# Altium PCB PCB3.PcbDoc
Units mm, origin at the board's own origin, x right, y up, seen from the top; angles counter-clockwise.
Board outline 70 x 70 mm, 2 copper layers (Top Layer, Bottom Layer); 85 components, 71 nets, 282 pads, 5 vias.
Unrouted connection lines stored in the file: 144.
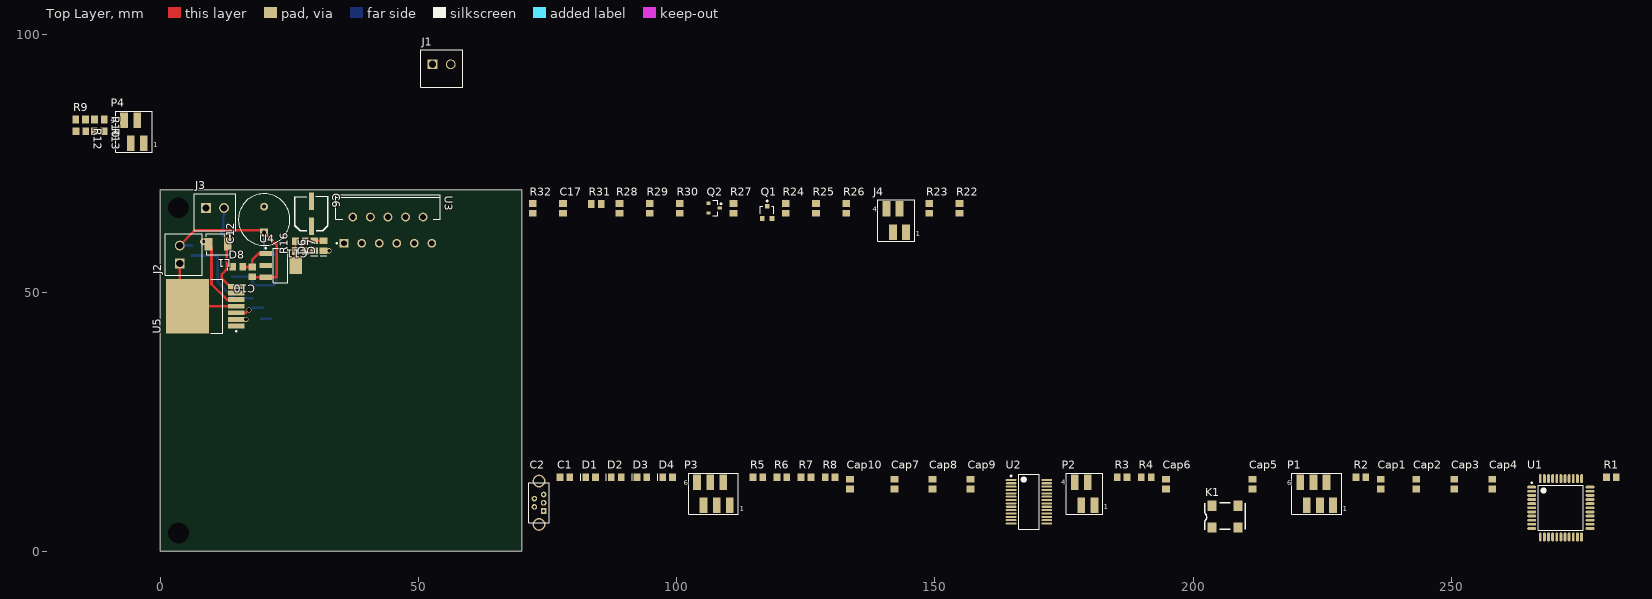
[diagram p0: Top Layer view]
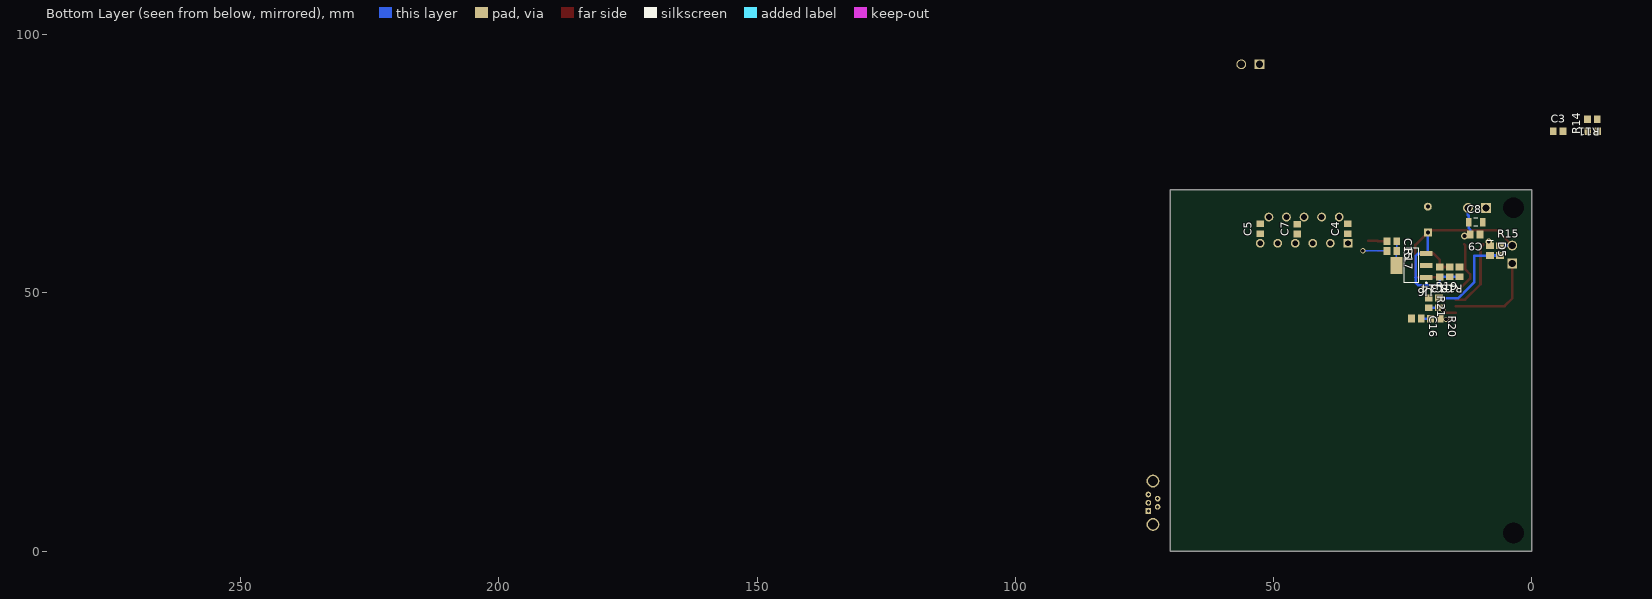
[diagram p1: Bottom Layer view, seen from below]

## Layer stack, top to bottom
Top Solder: solder mask 0.0102, Solder Resist, Dk 3.5
Top Layer: signal copper 0.0356
Dielectric 1: dielectric 0.32, FR-4, Dk 4.8
Bottom Layer: signal copper 0.0356
Bottom Solder: solder mask 0.0102, Solder Resist, Dk 3.5

## Board outline
0,70 70,70 70,0 0,0

## Design rules (kind name [scope] priority, off if disabled: settings)
Clearance [All] p1: gap=0.254
PolygonConnect [All] p1: connectstyle=Relief reliefconductorwidth=0.254 reliefentries=4 polygonreliefangle="90 Angle" airgapwidth=0.254
RoomDefinition "Sheet 4 - Capteurs" [InComponentClass('Sheet 4 - Capteurs')] p1: confinementstyle=ConfineIn formatcopy=TRUE lockcomponents=FALSE outline 71.135,58.559 158.614,58.559 158.614,70.735 71.135,70.735
RoomDefinition "Sheet 1 - Micro" [InComponentClass('Sheet 1 - Micro')] p2: confinementstyle=ConfineIn formatcopy=TRUE lockcomponents=FALSE outline 71.16,1.431 282.87,1.431 282.87,17.857 71.16,17.857
RoutingVias [All] p1: holewidth=0.711 width=1.27 viastyle="Through Hole" minholewidth=0.711 minwidth=1 maxholewidth=0.711 maxwidth=1.5
SolderMaskExpansion [All] p1: expansion=0.102
UnpouredPolygon [All] p1: allowunpoured=FALSE
Width [All] p1: maxlimit=0.5 minlimit=0.254 preferedwidth=0.254
29 further rules are at their usual default settings.

## Classes and differential pairs
component class "Sheet 4 - Capteurs": C17 J4 Q1 Q2 R22 R23 R24 R25 R26 R27 R28 R29 R30 R31 R32
component class "Sheet 3 - Alims": C8 C9 C10 C11 C12 C13 C14 C15 C16 D5 D6 D7 D8 J2 J3 L1 R15 R16 R17 R18 R19 R20 R21 U4 U5 U6
component class "Sheet 2 - Moteurs": C3 C4 C5 C6 C7 J1 P4 R9 R10 R11 R12 R13 R14 U3
component class "Sheet 1 - Micro": C1 C2 Cap1 Cap2 Cap3 Cap4 Cap5 Cap6 Cap7 Cap8 Cap9 Cap10 D1 D2 D3 D4 K1 P1 P2 P3 R1 R2 R3 R4 R5 R6 R7 R8 U1 U2

## Components (designator, comment, footprint, x,y, rotation, side; value= is the part's Value field where it differs from the comment)
C1 "100pF" C0805 78.335,14.307 r0 top
C2 "WE-Communication Connectors 651005136421" 651005136421 73.335,9.357 r90 top
C3 "0.1uF" C0805 -5.15,81.3 r180 bottom
C4 "10nF" C0805 35.6,62.425 r90 bottom
C5 "10nF" C0805 52.575,62.425 r90 bottom
C6 "220uF" "Capa CMS D6.3_E1.8" 29.25,65.35 r270 top
C7 "1uF" C0805 45.375,62.375 r90 bottom
C8 "100uF" C1206 10.8,63.7 r180 bottom
C9 "0.1uF" C0805 10.925,61.325 r0 bottom
C10 "1uF" C0805 17.8,54.075 r270 top
C11 "10uF" C0805 27.1,60 r180 top
C12 "1200uF" CAPA_D10_E5 20.1,64.2 r90 top
C13 "0.1uF" C0805 15.85,54.075 r270 bottom
C14 "1UF" C0805 17.775,54.05 r270 bottom
C15 "10uF" C0805 27.075,60.025 r180 bottom
C16 "0.2uF" C0805 22.3,45.025 r180 bottom
C17 "100pF" C0805 77.985,66.36 r90 top
Cap1 "0.1uF" C0805 236.343,12.982 r90 top
Cap2 "0.1uF" C0805 243.218,12.982 r90 top
Cap3 "0.1uF" C0805 250.569,12.982 r90 top
Cap4 "0.1uF" C0805 257.944,12.982 r90 top
Cap5 "0.1uF" C0805 211.517,12.982 r90 top
Cap6 "0.1uF" C0805 194.741,12.982 r90 top
Cap7 "0.1uF" C0805 142.188,12.982 r90 top
Cap8 "0.1uF" C0805 149.539,12.982 r90 top
Cap9 "4.7uF" C0805 156.914,12.982 r90 top
Cap10 "0.1uF" C0805 133.538,12.982 r90 top
D1 "LED" "LED 0805" 83.31,14.307 r0 top
D2 "LED" "LED 0805" 88.286,14.307 r0 top
D3 "LED" "LED 0805" 93.261,14.307 r0 top
D4 "LED" "LED 0805" 98.236,14.307 r0 top
D5 "D Schottky" D0805 8.05,58.175 r270 bottom
D6 "LED" "LED 0805" 29.8,59.125 r90 top
D7 "LED" "LED 0805" 31.6,59.125 r90 top
D8 "LED" "LED 0805" 14.975,55.05 r0 top
J1 "WE Type 691321100002" 691321100002 54.475,94.275 r0 top
J2 "WE Type 691321100002" 691321100002 3.75,57.425 r90 top
J3 "WE Type 691321100002" 691321100002 10.575,66.45 r0 top
J4 "WE 4 pins" 690367280476 142.513,64.009 r0 top
K1 "Quartz 10Mhz" IQXO-70 203.65,8.75 r0 top
L1 "15uH" "Inductance 4.06 x 4.45" 11.175,59.4 r180 top
P1 "mini connect" 690367280676 223.942,11.107 r0 top
P2 "mini connect" 690367280476 178.99,11.107 r0 top
P3 "Mini connect" 690367280676 107.112,11.107 r0 top
P4 "WE 4 pins" 690367280476 -5.126,81.225 r0 top
Q1 "MOSFET P" SOT-23 117.512,65.61 r0 top
Q2 "Transistor NPN" SOT23_L 107.237,66.41 r0 top
R1 "10K" 0805 281.02,14.307 r0 top
R2 "100R" 0805 232.518,14.307 r0 top
R3 "1K" 0805 186.265,14.307 r0 top
R4 "1K" 0805 190.941,14.307 r0 top
R5 "330R" 0805 115.712,14.307 r0 top
R6 "330R" 0805 120.362,14.307 r0 top
R7 "470R" 0805 125.037,14.307 r0 top
R8 "470R" 0805 129.713,14.307 r0 top
R9 "470R" 0805 -15.45,83.6 r0 top
R10 "10K" 0805 -11.825,83.575 r0 top
R11 "15K" 0805 -11.775,83.625 r0 bottom
R12 "1K" 0805 -15.4,81.3 r0 top
R13 "1K" 0805 -11.875,81.3 r0 top
R14 "1K" 0805 -11.825,81.325 r0 bottom
R15 "0R" 0805 6.1,58.2 r90 bottom
R16 "330R" 0805 27.1,58.1 r180 top
R17 "470R" 0805 27.05,58.1 r180 bottom
R18 "1K" 0805 13.95,54.075 r270 bottom
R19 "17K4" 0805 17.925,48.05 r90 bottom
R20 "1K" 0805 18.625,44.975 r180 bottom
R21 "2K" 0805 19.925,48.05 r270 bottom
R22 "215K" 0805 154.764,66.36 r90 top
R23 "10K" 0805 148.914,66.36 r90 top
R24 "0R" 0805 121.137,66.36 r90 top
R25 "1K" 0805 126.963,66.36 r90 top
R26 "0R" 0805 132.813,66.36 r90 top
R27 "1K" 0805 111.012,66.36 r90 top
R28 "0R" 0805 88.911,66.36 r90 top
R29 "10K" 0805 94.761,66.36 r90 top
R30 "0R" 0805 100.586,66.36 r90 top
R31 "10K" 0805 84.41,67.21 r0 top
R32 "3K4" 0805 72.135,66.36 r90 top
U1 "DSPIC33FJ128MC804T-I/PT" TQFP-PT44_N 271.245,8.382 r0 top
U2 "IC_FT232RL" SSOP-28 168.215,9.557 r0 top
U3 "LMD18200T" TA11B 44.075,62.15 r0 top
U4 "LM1117MP-3.3" MP04A_N 23.3,55.325 r0 top
U5 "LM2588S-ADJ" TS7B_N 8.7,47.425 r180 top
U6 "LM1117IMP-5.0" MP04A_N 23.275,55.3 r0 bottom

## Footprints (in the part's own frame and the unit in brackets; to place one, negate y for a bottom-side part, rotate by r counter-clockwise, add the part's x,y. Pads: shape width x height; smd on the part's side, far side on the other; paste and mask are expansions set on the pad)
0805 [mm] "Chip Resistor; Body 2.0 x 1.3 mm (LxW typ)"
  rect 1.3x1.5 smd: 1(-0.95,0) 2(0.95,0)
  body extent -1,-0.62 1,0.63, height 0.78
651005136421 [mm] "5 pins"
  rect 1.1x1.1 hole 0.6: 1(-1.6,-0.9)
  round 1.1 hole 0.6: 2(-0.8,0.9) 3(0,-0.9) 4(0.8,0.9) 5(1.6,-0.9)
  round 2.5 hole 2: Z1(4.2,0) Z2(-4.2,0)
  silkscreen extent -3.85,-1.98 3.85,1.98, body extent -5.1,-1.95 5.1,1.95, height 9.21
690367280476 [mm] "without Latch, 4 pins, SMT, straight"
  rect 1.5x3 smd: 1(1.905,-2.25) 2(0.635,2.25) 3(-0.635,-2.25) 4(-1.905,2.25)
  silkscreen extent -3.54,-4 3.54,4, body extent -3.54,-5 3.54,3.5, height 5.7
690367280676 [mm] "without Latch, 6 pins, SMT, straight"
  rect 1.5x3 smd: 1(3.175,-2.25) 2(1.905,2.25) 3(0.635,-2.25) 4(-0.635,2.25) 5(-1.905,-2.25) 6(-3.175,2.25)
  silkscreen extent -4.81,-4 4.81,4, body extent -4.81,-5 4.81,3.5, height 5.75
691321100002 [mm] "3,50mm - PCB Vertical - 02p"
  rect 1.9x1.9 hole 1.4: 1(-1.75,0)
  round 1.9 hole 1.4: 2(1.75,0)
  silkscreen extent -4.05,-4.4 4.05,2.8, body extent -4.05,-4.4 4.05,2.8, height 9.21
C0805 [mm] "Chip Resistor; Body 2.0 x 1.3 mm (LxW typ)"
  rect 1.3x1.5 smd: 1(-0.95,0) 2(0.95,0)
  body extent -0.97,-0.62 1.03,0.63, height 0.78
C1206 [mm] "Chip Capacitor, Body 3.2x1.6mm, IPC High Density"
  rect 1.1x1.7 smd: 1(-1.35,0) 2(1.35,0)
  silkscreen extent -0.4,-0.75 0.4,0.75, body extent -1.7,-0.9 1.7,0.9, height 1.3
"Capa CMS D6.3_E1.8" [mm]
  rect 3.4x1 smd: 1(2.4,0) 2(-2.4,0)
  silkscreen extent -3.33,-3.2 3.3,3.2, body extent -3.77,-3.3 3.83,3.3, height 8
CAPA_D10_E5 [mm]
  rect 1.524x1.524 hole 0.8: 1(-2.5,0)
  round 1.524 hole 0.8: 2(2.5,0)
  silkscreen extent -5,-5 5,5, body extent -5,-5 5,5, height 12
D0805 [mm] "Chip Capacitor; Body 2.0 x 1.2 mm (LxW typ)"
  rect 1.3x1.5 smd: 1(-0.95,0) 2(0.95,0)
  silkscreen extent -1.9,-0.65 -1.9,0.65, body extent -1.17,-0.67 1.13,0.68, height 0.76
"Inductance 4.06 x 4.45" [mm]
  rect 1.5x2.4 smd: 1(-1.85,0) 2(1.85,0)
  silkscreen extent -2.25,-2.05 2.25,2.05
IQXO-70 [mil]
  rect 70x79 smd: 1(0,-165) 2(200,-165) 3(200,0) 4(0,0)
  silkscreen extent -55,-182 255,25, body extent -18,-154 226,-8, height 48
"LED 0805" [mm] "Chip Capacitor; Body 2.0 x 1.2 mm (LxW typ)"
  rect 1.3x1.5 smd: 1(-0.95,0) 2(0.95,0)
  silkscreen extent -1.9,-0.65 -1.9,0.65, body extent -1.01,-0.62 1.01,0.63, height 1.1
MP04A_N [mm] "SOT223, 4-Leads, Body 6.5x3.5mm, Pitch 2.3mm, Lead Span 7mm, IPC Medium Density"
  rect 2.4x1 smd: 1(-2.9,2.3) 2(-2.9,0) 3(-2.9,-2.3)
  rect 2.4x3.3 smd: 4(2.9,0)
  silkscreen extent -3.02,-3.35 1.4,3.47, body extent -1.85,-3.35 1.85,3.35, height 1.8
SOT23_L [mm] "SOT23, 3-Leads, Body 2.9x1.3mm, Pitch 0.95mm, Lead Span 2.3mm - Reverse Pinning, IPC High Density"
  rect 0.85x0.6 smd: 1(1.075,0) 2(-1.075,-0.95) 3(-1.075,0.95)
  silkscreen extent -0.3,-1.5 1.48,1.5, body extent -0.7,-1.5 0.7,1.5, height 1.1
SOT-23 [mm] "SOT-23; 3 Leads; Body 3.0 x 2.5 mm, inc. leads (LxW max), Alternate Lead Configuration"
  rect 0.9x0.95 smd: 1(0,1.175) 2(-0.95,-1.175) 3(0.95,-1.175)
  silkscreen extent -1.3,-0.3 1.3,2.32
SSOP-28 [mm] "28-Pin SSOP 0.65 mm Pitch"
  oval 2.1x0.4 smd: 1(-3.45,4.225) 2(-3.45,3.575) 3(-3.45,2.925) 4(-3.45,2.275) 5(-3.45,1.625) 6(-3.45,0.975) 7(-3.45,0.325) 8(-3.45,-0.325) 9(-3.45,-0.975) 10(-3.45,-1.625) 11(-3.45,-2.275) 12(-3.45,-2.925) 13(-3.45,-3.575) 14(-3.45,-4.225) 15(3.45,-4.225) 16(3.45,-3.575) 17(3.45,-2.925) 18(3.45,-2.275) 19(3.45,-1.625) 20(3.45,-0.975) 21(3.45,-0.325) 22(3.45,0.325) 23(3.45,0.975) 24(3.45,1.625) 25(3.45,2.275) 26(3.45,2.925) 27(3.45,3.575) 28(3.45,4.225)
  silkscreen extent -3.57,-5.3 2,5.3, body extent -2.7,-5.3 2.7,5.3, height 2
TA11B [mm] "TO, Thru-Hole, Vertical, Heatsink Mounted; 11 Bent Staggered Leads; Pitch 1.7 mm"
  rect 1.7x1.7 hole 1.1: 1(-8.5,-2.54)
  round 1.7 hole 1.1: 2(-6.8,2.54) 3(-5.1,-2.54) 4(-3.4,2.54) 5(-1.7,-2.54) 6(0,2.54) 7(1.7,-2.54) 8(3.4,2.54) 9(5.1,-2.54) 10(6.8,2.54) 11(8.5,-2.54)
  silkscreen extent -10.15,-2.66 10.15,6.84, body extent -10.15,2.14 10.15,6.84, height 21
TQFP-PT44_N [mm] "Thin QFP, 44-Leads, Body 10x10mm, Pitch 0.8mm, IPC Medium Density"
  oval 1.75x0.55 smd: 1(-5.65,4) 2(-5.65,3.2) 3(-5.65,2.4) 4(-5.65,1.6) 5(-5.65,0.8) 6(-5.65,0) 7(-5.65,-0.8) 8(-5.65,-1.6) 9(-5.65,-2.4) 10(-5.65,-3.2) 11(-5.65,-4) 23(5.65,-4) 24(5.65,-3.2) 25(5.65,-2.4) 26(5.65,-1.6) 27(5.65,-0.8) 28(5.65,0) 29(5.65,0.8) 30(5.65,1.6) 31(5.65,2.4) 32(5.65,3.2) 33(5.65,4)
  oval 0.55x1.75 smd: 12(-4,-5.65) 13(-3.2,-5.65) 14(-2.4,-5.65) 15(-1.6,-5.65) 16(-0.8,-5.65) 17(0,-5.65) 18(0.8,-5.65) 19(1.6,-5.65) 20(2.4,-5.65) 21(3.2,-5.65) 22(4,-5.65) 34(4,5.65) 35(3.2,5.65) 36(2.4,5.65) 37(1.6,5.65) 38(0.8,5.65) 39(0,5.65) 40(-0.8,5.65) 41(-1.6,5.65) 42(-2.4,5.65) 43(-3.2,5.65) 44(-4,5.65)
  silkscreen extent -5.77,-4.35 4.35,4.95, body extent -5,-5 5,5, height 1.2
TS7B_N [mm] "D2-PAK, 8-Leads, Body 8.6x10.2mm, Pitch 1.27mm, Lead Span 14.1mm, IPC Medium Density"
  rect 3.2x0.95 smd: 1(-6,3.81) 2(-6,2.54) 3(-6,1.27) 4(-6,0) 5(-6,-1.27) 6(-6,-2.54) 7(-6,-3.81)
  rect 8.3x10.5 smd: 8(3.45,0)
  silkscreen extent -6.13,-5.2 -1.1,5.2, body extent -3.35,-5.2 6.05,5.2, height 4.64

## Part data
C1 C3 C4 C5 C7 C9 C10 C11 C13 C14 C15 C16 C17 Cap1 Cap2 Cap3 Cap4 Cap5 Cap6 Cap7 Cap8 Cap9: library part Cap, "Capacitor 0805"
C2: "WR-COM Mini USB Vertical TH Type B 5 Contacts"
C6: library part Cap2, "EEEFK1C221XP"
C8: library part Cap2, "Capacitor 1206"
C12: library part Cap2, "EEUFM1C122L"
Cap10: library part Cap, "Capacitor"
D1 D2 D3 D4 D6 D7 D8: library part LED2, "Typical RED, GREEN, YELLOW, AMBER GaAs LED 0805"
D5: "Schottky Diode 0805"
J1 J2 J3: library part "WE-Terminal Blocks Plugable Type 691321100002", "WR-TBL Terminal block - serie 3211 - 3.50 mm"
J4: library part "MICRO-MATCH FOB.04P", "connecteur WE"
K1: library part OSCILLATEUR, "Oscillateur quartz"
L1: library part Inductor, "SRP4020TA-150M"
P1 P3: library part MHDR1X6, "Header, 6-Pin"
P2 P4: library part MHDR1X4, "Header, 4-Pin"
Q1: library part PMOS-2, "P-Channel Power MOSFET"
Q2: library part QNPN, "NPN Bipolar Transistor"
R1 R2 R3 R4 R5 R6 R7 R8 R9 R10 R11 R12 R13 R14 R15 R16 R17 R18 R19 R20 R21 R22 R23 R24 R25 R26 R27 R28 R29 R30 R31 R32: library part Res3, "Resistor 0805"
U1: "High-Performance 16-bit Digital Signal Controller, 128 KB Flash, 16 KB RAM, 44-Pin TQFP, Industrial Temperature, Tape and Reel"
U2: "FT232R USB UART"
U3: "3A, 55V H-Bridge"
U4 U6: "800mA Low-Dropout Linear Regulator"
U5: "SIMPLE SWITCHER 5A Flyback Regulator with Shutdown"

## Free pads (board coordinates)
  round 1.524 hole 4 paste+1 mask+2: 11(3.5,3.5)
  round 1.524 hole 4 paste+2 mask+2: 12(3.5,66.5)

## Via types
v1: diameter 1, hole 0.711, Top Layer to Bottom Layer, 3 vias
v2: diameter 1.27, hole 0.711, Top Layer to Bottom Layer, 2 vias

## Nets (pads, with @x,y where several pads share a name; then routed paths per layer and width w, separated by ;. In a path a pad name is that pad's centre, name@x,y a point inside that pad or via, vN(x,y) a via of type N, cw(c..) or ccw(c..) an arc to the next point about the centre after c; other vN are vias at no path point)
"3.3 V": R1.2
3.3V: C1.2 C11.2 Cap1.2 Cap2.2 Cap3.2 P1.2 P2.3 P3.4 R3.2 R4.2 R16.2 R22.1 U1.17 U1.28 U1.40 U4.2 U4.4 | length 4.7
  Top Layer w0.3: C11.2 R16.2 26.15,55.375 U4.4
5V: C2.1 C3.2 C15.2 Cap6.2 Cap7.1 Cap8.1 Cap9.1 K1.1 K1.4 P4.3 R17.2 U2.4 U2.20 U6.2 U6.4 | length 4.8
  Bottom Layer w0.3: C15.2 26.1,60 R17.2 26.175,58.025 U6.4
12V: C6.1 C7.2 C10.2 C12.1 C13.2 C14.2 J2.2 Q1.3 R15.2 R18.2 R23.2 U3.6 U4.3 U6.3 | length 56.6
  Top Layer w0.5: J2.2 6.739,62.164 19.636,62.164 C12.1 22.525,59.275 22.525,53.025 U4.3 17.9,53.025 C10.2 C10.2@17.725,53.2
  Bottom Layer w0.5: J2.2 6.075,59.175 R15.2 ; R18.2 C13.2 17.75,53.125 C14.2 17.775,52.025 18.325,51.475 21.95,51.475 22.475,52 22.475,52.875 22.45,52.85 22.45,53.025 ; C12.1 20.1,57.875 U6.3 22,57.6 22.45,57.15 22.45,53.025 ; 22.351,52.949 22.427,53.025 22.45,53.025 ; 22.525,53.025 22.45,53.025
"EN CAPTEUR": J4.4 Q1.1
GND: C1.1 C2.5 C3.1 C6.2 C7.1 C8.2 C9.1 C10.1 C11.1 C12.2 C13.1 C14.1 C15.1 C16.1 C17.2 Cap1.1 Cap2.1 Cap3.1 Cap4.1 Cap5.1 Cap6.1 Cap7.2 Cap8.2 Cap9.2 Cap10.2 D1.2 D2.2 D3.2 D4.2 D6.2 D7.2 D8.2 J2.1 J3.1 J4.1 J4.3 K1.2 P1.3 P2.1 P3.6 P4.2 Q2.2 R11.2 R14.2 R21.1 R31.1 R32.1 U1.6 U1.16 U1.29 U1.39 U2.7 U2.18 U2.21 U2.25 U2.26 U3.7 U4.1 U5.4 U5.8 U6.1 | length 28.5
  Top Layer w0.5: J2.1 3.75,48.925 U5.8 U5.4 ; D8.2 15.95,55.025 C10.1 17.8,56.425 19,57.625 U4.1 ; C11.1 29.725,60 D6.2 D7.2
  Bottom Layer w0.5: C14.1@17.75,55.025 C14.1 C14.1@17.988,55
NC: U2.8 U2.24
NetC2_2: C2.2 U2.16
NetC2_3: C2.3 U2.15
NetC4_1: C4.1 U3.1
NetC4_2: C4.2 J1.1 U3.2
NetC5_1: C5.1 U3.11
NetC5_2: C5.2 J1.2 U3.10
NetC8_1: C8.1 C9.2 J3.2 L1.1 U5.7 | length 17.3
  Top Layer w0.5: L1.1 12.871,59.246 12.871,54.591 11.896,53.616 11.896,52.784 13.736,50.944 14.409,50.944 U5.7
  Bottom Layer w0.5: J3.2 12.325,65.05 12.15,64.875 C8.1 12.15,62.5 11.875,62.225 C9.2 12.175,61.025 v2(13,61.025)
NetC16_2: C16.2 R20.1 | length 1.8
  Bottom Layer w0.5: R20.1 21.3,44.975 C16.2
NetC17_1: C17.1 R24.2 R28.2
NetCap5_2: Cap5.2 R1.1 R2.1
NetCap10_1: Cap10.1 U2.17
NetD1_1: D1.1 R5.2
NetD2_1: D2.1 R6.2
NetD3_1: D3.1 R7.2
NetD4_1: D4.1 R8.2
NetD5_1: D5.1 L1.2 U5.5 | length 14.9
  Top Layer w0.5: L1.2 9.904,58.821 9.904,51.678 12.887,48.695 U5.5
  Bottom Layer w0.5: D5.1 8.3,59.375 v2(8.3,59.95)
NetD5_2: D5.2 R15.1 R19.2 | length 18.2
  Bottom Layer w0.5: R15.1 8.025,57.25 D5.2 8.075,57.2 11.075,57.2 11.075,52.125 14.2,49 R19.2
NetD6_1: D6.1 R16.1 | length 1.8
  Top Layer w0.3: R16.1 29.725,58.1 D6.1
NetD7_1: D7.1 R17.1 | length 5.8
  Top Layer w0.3: D7.1 v1(32.675,58.175)
  Bottom Layer w0.3: R17.1 28.075,58.175 v1(32.675,58.175)
NetD8_1: D8.1 R18.1
NetJ4_2: J4.2 R26.2 R30.1
NetK1_3: K1.3 U1.30
NetP1_1: P1.1 R2.2 U1.18
NetP1_4: P1.4
NetP1_5: P1.5 U1.22
NetP2_2: P2.2 R3.1 U1.1
NetP2_4: P2.4 R4.1 U1.44
NetP3_1: P3.1 U1.32
NetP3_2: P3.2 U1.15
NetP3_3: P3.3 U1.14
NetP3_5: P3.5 U1.13
NetP4_1: P4.1 R13.2
NetP4_4: P4.4 R10.2
NetQ1_1: Q1.2 Q2.3 R23.1
NetQ2_1: Q2.1 R27.1 R31.2
NetR5_1: R5.1
NetR6_1: R6.1
NetR7_1: R7.1 U2.23
NetR8_1: R8.1 U2.22
NetR9_1: R9.1 U1.4
NetR9_2: R9.2 R10.1 R11.1
NetR12_1: R12.1 U1.5
NetR12_2: R12.2 R13.1 R14.1
NetR19_1: R19.1 R21.2 U5.3 | length 4.7
  Top Layer w0.5: U5.3 16.605,46.155 v1(17.15,46.7)
  Bottom Layer w0.5: R19.1 R21.2
NetR20_2: R20.2 U5.2 | length 1.9
  Top Layer w0.5: U5.2 14.71,44.875 v1(16.575,44.875)
NetR22_2: R22.2 R24.1 R25.1
NetR25_2: R25.2 R26.1
NetR27_2: R27.2
NetR28_1: R28.1 R29.2 R32.2
NetR29_1: R29.1 R30.2
NetU1_2: U1.2 U3.5
NetU1_3: U1.3 U3.3
NetU1_8: U1.8
NetU1_9: U1.9
NetU1_10: U1.10 U2.1
NetU1_11: U1.11 U2.5
NetU1_23: U1.23
NetU1_24: U1.24
NetU1_25: U1.25
NetU1_26: U1.26
NetU1_34: U1.34
NetU1_35: U1.35
NetU1_43: U1.43
VCAP: Cap4.2 U1.7
pads on no net: C2.4 C2.Z1 C2.Z2 P1.6 U1.12 U1.19 U1.20 U1.21 U1.27 U1.31 U1.33 U1.36 U1.37 U1.38 U1.41 U1.42 U2.2 U2.3 U2.6 U2.9 U2.10 U2.11 U2.12 U2.13 U2.14 U2.19 U2.27 U2.28 U3.4 U3.8 U3.9 U5.1 U5.6

## Polygon pours and split planes (outlines as drawn)
GND on Bottom Layer "plan de masse" (solid, remove dead copper, shelved, pour order 8): 0,70 70,70 70,0 0,0 0,70
GND on Bottom Layer "plan de masse" (solid, remove dead copper, shelved, pour order 6): 0,70 70,70 70,0 0,0
GND on Bottom Layer "plan de masse" (solid, remove dead copper, shelved, pour order 4): 0,70 70,70 70,0 0,0
GND on Bottom Layer "plan de masse" (solid, remove dead copper, shelved, pour order 2): 0,70 70,70 70,0 0,0

## Silkscreen, mask and mechanical layers (free items; w line width, h text height)
Mechanical 1:
  lines w0.254: 3.246,3.5 3.754,3.5 ; 3.246,66.5 3.754,66.5 ; 3.5,3.246 3.5,3.754 ; 3.5,66.246 3.5,66.754
  lines w1.2: 0,0 0,70 70,70 70,0 0,0
  text "3.5,66.5 (mm)" at 3.754,66.5 h1.52
  text "3.5,3.5 (mm)" at 3.754,3.5 h1.52

## Dimensions
0,70 to 50,68.075 on Mechanical 15

## Text inside footprints (layer, text, board x,y; h text height)
J4: Top Overlay "4" at 138.013,65.759 h1; Top Overlay "1" at 146.263,61.009 h1
P1: Top Overlay "6" at 218.227,12.758 h1; Top Overlay "1" at 229.022,7.678 h1
P2: Top Overlay "4" at 174.49,12.857 h1; Top Overlay "1" at 182.74,8.107 h1
P3: Top Overlay "6" at 101.397,12.758 h1; Top Overlay "1" at 112.192,7.678 h1
P4: Top Overlay "4" at -9.626,82.975 h1; Top Overlay "1" at -1.376,78.225 h1